# Altium PCB PCB1_b.PCBDOC
Units mil, origin at the board's own origin, x right, y up, seen from the top; angles counter-clockwise.
Board outline 6000 x 4000 mil, 2 copper layers (Top Layer, Bottom Layer); 30 components, 0 nets, 297 pads, 42 vias.
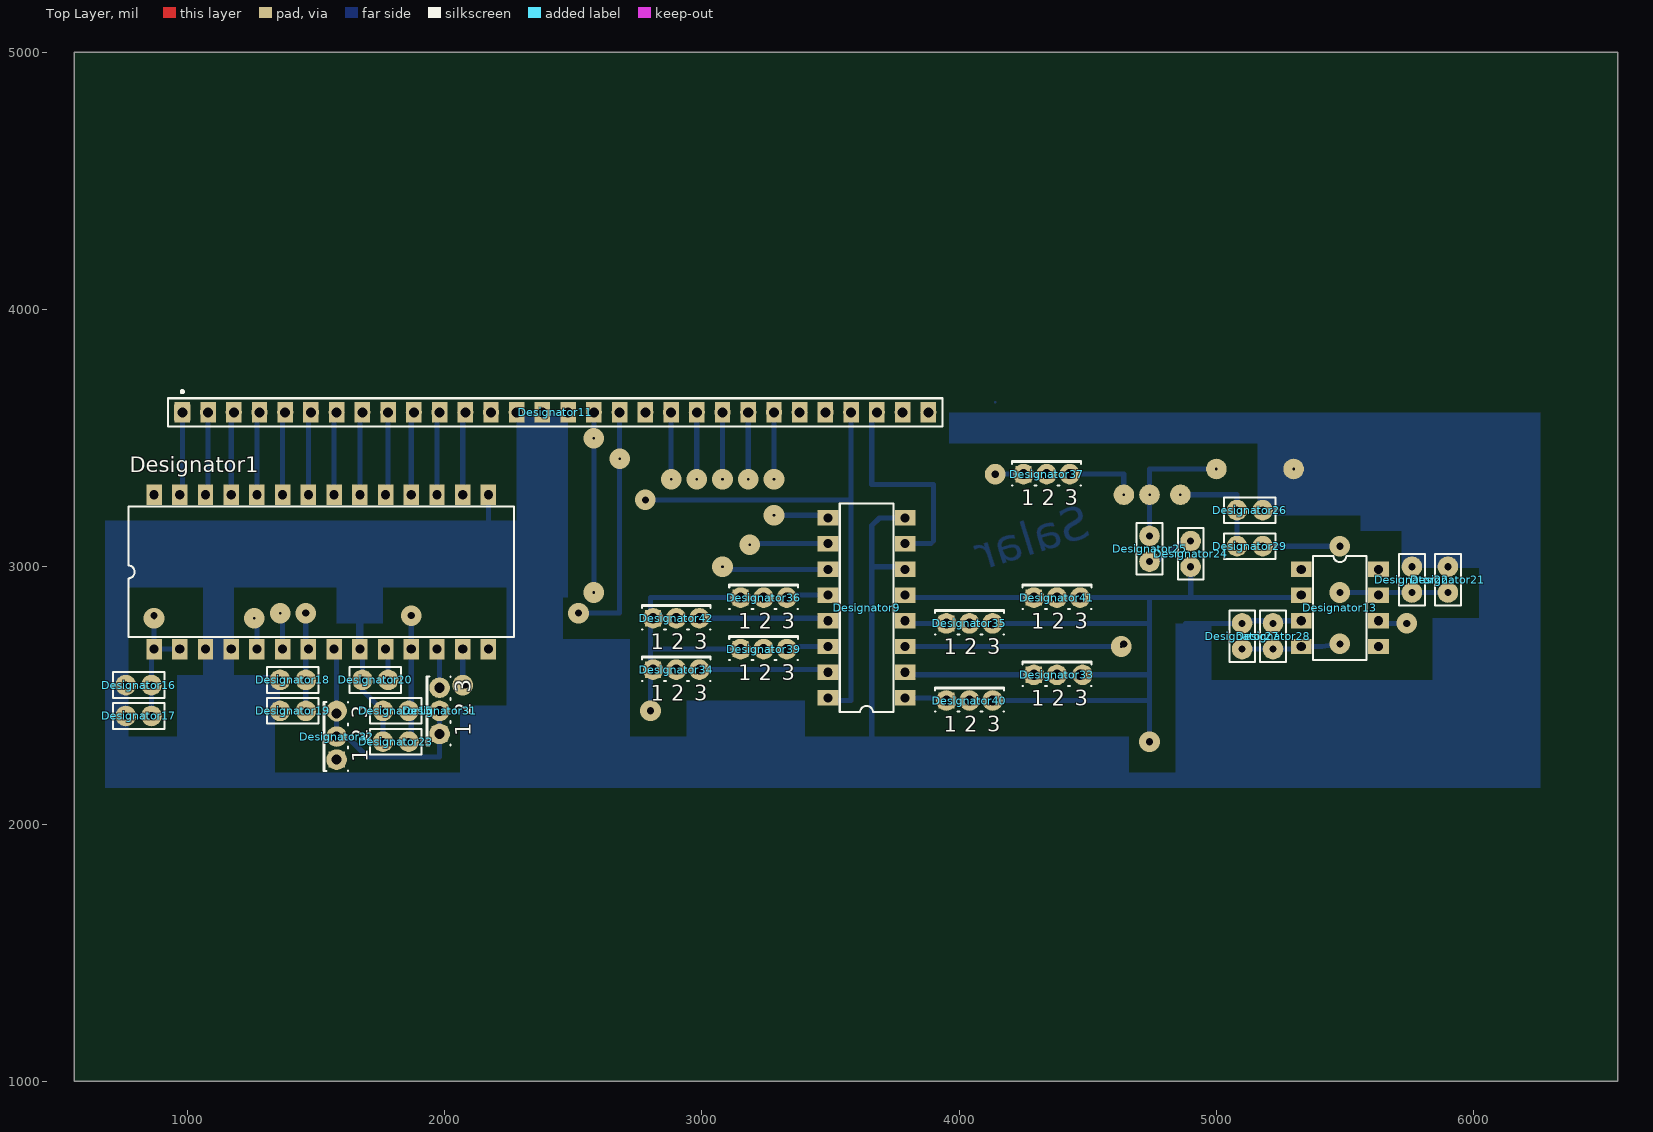
[diagram p0: Top Layer view]
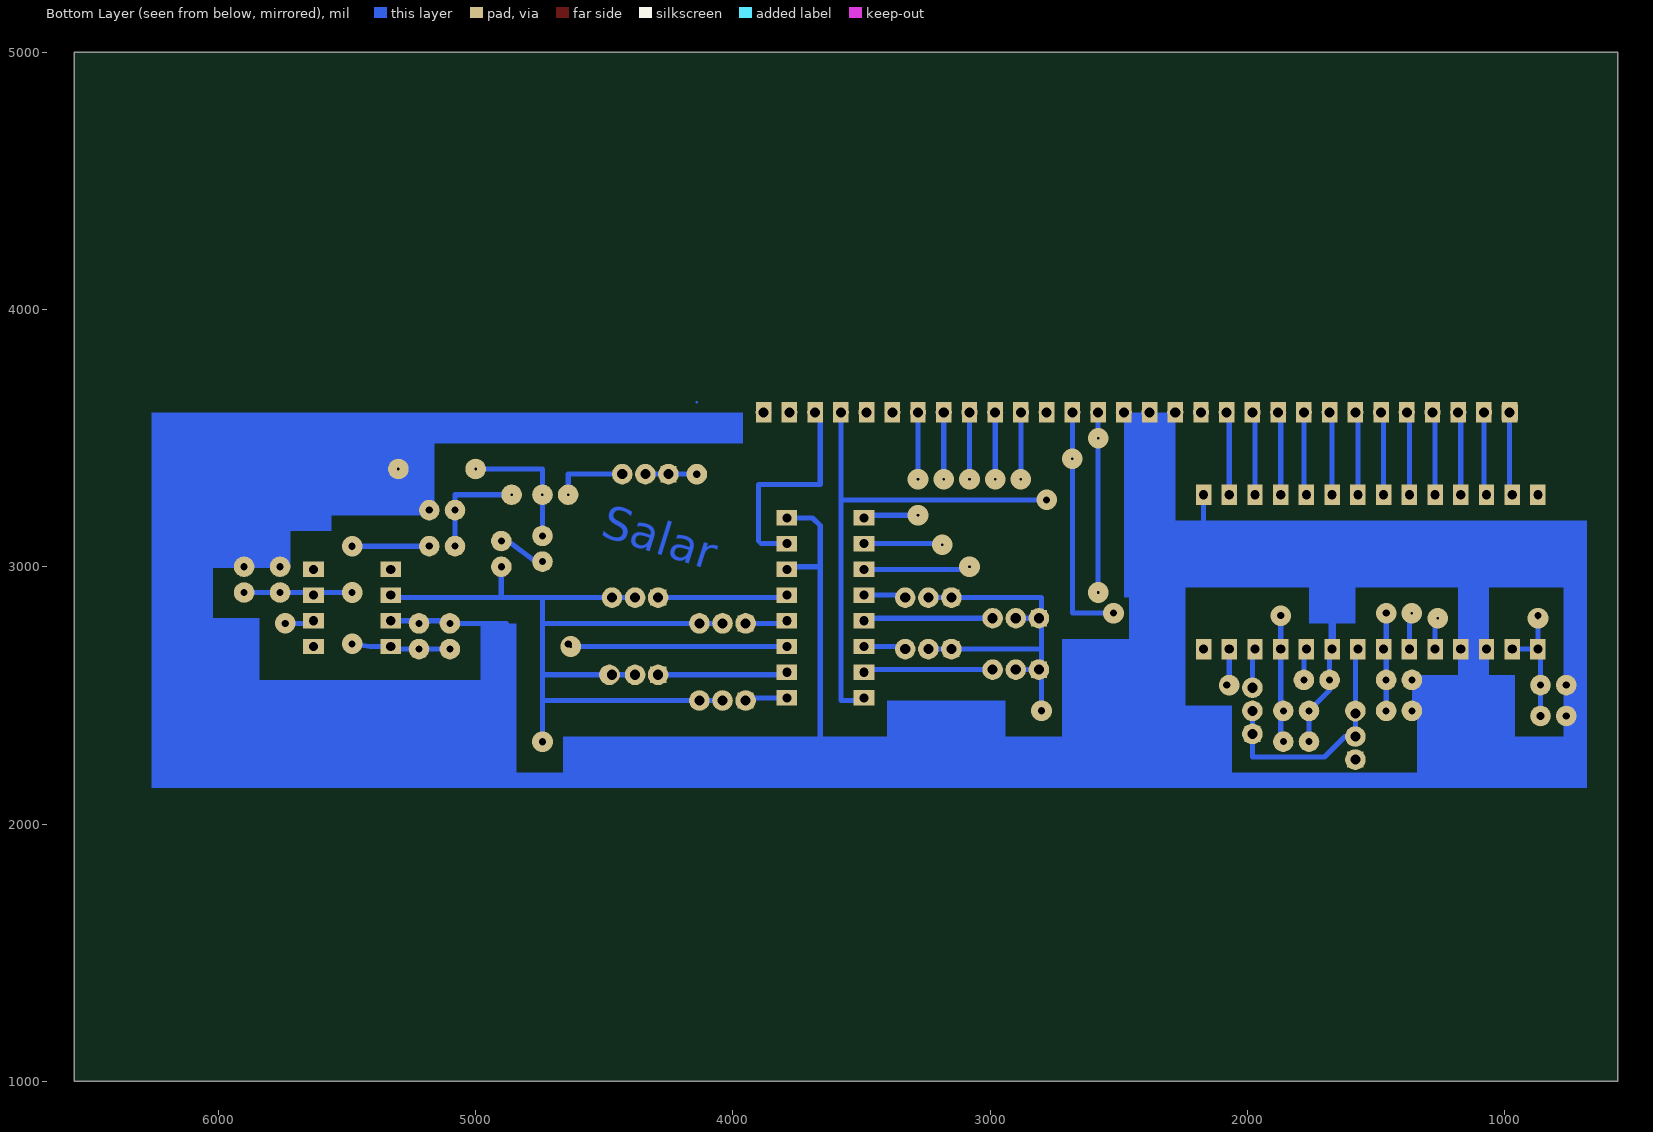
[diagram p1: Bottom Layer view, seen from below]

## Layer stack, top to bottom
Top Layer: signal copper 1.4
Dielectric: dielectric 12.6, FR-4, Dk 4.8
Bottom Layer: signal copper 1.4

## Board outline
560,1000 560,5000 6560,5000 6560,1000

## Design rules (kind name [scope] priority, off if disabled: settings)
Clearance [All] p1: gap=10
ComponentClearance [All] p1: gap=10 collisioncheckmode=0
PolygonConnect [All] p1: connectstyle=Relief reliefconductorwidth=10 reliefentries=4 polygonreliefangle="90 Angle"
RoutingLayers [All] p1: top layer=Horizontal bottom layer=Vertical
RoutingVias [All] p1: holewidth=28 width=50 viastyle="Through Hole" minholewidth=28 minwidth=50 maxholewidth=28 maxwidth=50
SolderMaskExpansion [All] p1: expansion=4
TestPointUsage [All] p1: valid=0 allowmultiple=FALSE
Testpoint [All] p1: side=15 testpointundercomponent=TRUE minsize=40 maxsize=100 preferedsize=60 minholesize=0 maxholesize=40 preferedholesize=32 testpointgrid=1 style=1023 order=1234567890
Width [All] p1: maxlimit=10 minlimit=10 preferedwidth=10
10 further rules are at their usual default settings.

## Components (designator, comment, footprint, x,y, rotation, side; value= is the part's Value field where it differs from the comment)
Designator1 "Comment" DIP-28/D38.1 1520,2980 r0 top
Designator9 "Comment" DIP-16 3640,2840 r90 top
Designator11 "Comment" HDR1X30 980,3600 r0 top
Designator13 "Comment" DIP-8 5480,2840 r270 top
Designator15 "Comment" RAD-0.1 1760,2440 r0 top
Designator16 "Comment" RAD-0.1 760,2540 r0 top
Designator17 "Comment" RAD-0.1 760,2420 r0 top
Designator18 "Comment" RAD-0.1 1360,2560 r0 top
Designator19 "Comment" RAD-0.1 1360,2440 r0 top
Designator20 "Comment" RAD-0.1 1680,2560 r0 top
Designator21 "Comment" RAD-0.1 5900,2900 r90 top
Designator22 "Comment" RAD-0.1 5760,2900 r90 top
Designator23 "Comment" RAD-0.1 1760,2320 r0 top
Designator24 "Comment" RAD-0.1 4900,3000 r90 top
Designator25 "Comment" RAD-0.1 4740,3020 r90 top
Designator26 "Comment" RAD-0.1 5080,3220 r0 top
Designator27 "Comment" RAD-0.1 5100,2680 r90 top
Designator28 "Comment" RAD-0.1 5220,2680 r90 top
Designator29 "Comment" RAD-0.1 5080,3080 r0 top
Designator31 "Comment" SFM-T3/A2.4V 1980,2440 r90 top
Designator32 "Comment" SFM-T3/A2.4V 1580,2340 r90 top
Designator33 "Comment" SFM-T3/A2.4V 4380,2580 r0 top
Designator34 "Comment" SFM-T3/A2.4V 2900,2600 r0 top
Designator35 "Comment" SFM-T3/A2.4V 4040,2780 r0 top
Designator36 "Comment" SFM-T3/A2.4V 3240,2880 r0 top
Designator37 "Comment" SFM-T3/A2.4V 4340,3360 r0 top
Designator39 "Comment" SFM-T3/A2.4V 3240,2680 r0 top
Designator40 "Comment" SFM-T3/A2.4V 4040,2480 r0 top
Designator41 "Comment" SFM-T3/A2.4V 4380,2880 r0 top
Designator42 "Comment" SFM-T3/A2.4V 2900,2800 r0 top

## Footprints (in the part's own frame and the unit in brackets; to place one, negate y for a bottom-side part, rotate by r counter-clockwise, add the part's x,y. Pads: shape width x height; smd on the part's side, far side on the other; paste and mask are expansions set on the pad)
DIP-8 [mm]
  rect 1.5x1.5 hole 0.9: 1(-3.81,-3.81)
  round 1.5 hole 0.9: 2(-1.27,-3.81) 3(1.27,-3.81) 4(3.81,-3.81) 5(3.81,3.81) 6(1.27,3.81) 7(-1.27,3.81) 8(-3.81,3.81)
  silkscreen extent -5.15,-2.65 5.15,2.65
DIP-16 [mm]
  rect 1.5x1.5 hole 0.9: 1(-8.89,-3.81)
  round 1.5 hole 0.9: 2(-6.35,-3.81) 3(-3.81,-3.81) 4(-1.27,-3.81) 5(1.27,-3.81) 6(3.81,-3.81) 7(6.35,-3.81) 8(8.89,-3.81) 9(8.89,3.81) 10(6.35,3.81) 11(3.81,3.81) 12(1.27,3.81) 13(-1.27,3.81) 14(-3.81,3.81) 15(-6.35,3.81) 16(-8.89,3.81)
  silkscreen extent -10.3,-2.65 10.3,2.65
DIP-28/D38.1 [mm]
  rect 1.5x1.5 hole 0.9: 1(-16.51,-7.62)
  round 1.5 hole 0.9: 2(-13.97,-7.62) 3(-11.43,-7.62) 4(-8.89,-7.62) 5(-6.35,-7.62) 6(-3.81,-7.62) 7(-1.27,-7.62) 8(1.27,-7.62) 9(3.81,-7.62) 10(6.35,-7.62) 11(8.89,-7.62) 12(11.43,-7.62) 13(13.97,-7.62) 14(16.51,-7.62) 15(16.51,7.62) 16(13.97,7.62) 17(11.43,7.62) 18(8.89,7.62) 19(6.35,7.62) 20(3.81,7.62) 21(1.27,7.62) 22(-1.27,7.62) 23(-3.81,7.62) 24(-6.35,7.62) 25(-8.89,7.62) 26(-11.43,7.62) 27(-13.97,7.62) 28(-16.51,7.62)
  silkscreen extent -19.05,-6.45 19.05,6.45
HDR1X30 [mm]
  rect 1.6x1.6 hole 0.99: 1(0,0)
  round 1.6 hole 0.99: 2(2.54,0) 3(5.08,0) 4(7.62,0) 5(10.16,0) 6(12.7,0) 7(15.24,0) 8(17.78,0) 9(20.32,0) 10(22.86,0) 11(25.4,0) 12(27.94,0) 13(30.48,0) 14(33.02,0) 15(35.56,0) 16(38.1,0) 17(40.64,0) 18(43.18,0) 19(45.72,0) 20(48.26,0) 21(50.8,0) 22(53.34,0) 23(55.88,0) 24(58.42,0) 25(60.96,0) 26(63.5,0) 27(66.04,0) 28(68.58,0) 29(71.12,0) 30(73.66,0)
  silkscreen extent -1.4,-1.4 75.06,2.17
RAD-0.1 [mm]
  round 1.2 hole 0.7: 1(0,0) 2(2.54,0)
  silkscreen extent -1.27,-1.27 3.81,1.27
SFM-T3/A2.4V [mm]
  rect 1.6x1.6 hole 1: 1(-2.28,0)
  round 1.6 hole 1: 2(0,0) 3(2.28,0)
  silkscreen extent -3.4,-1.1 3.4,1.3

## Free pads (board coordinates)
  rect 60x80 hole 10: 0(1480,3600) 0(2780,3600) 0(3880,3600) 1(1380,3600) 1(2680,3600) 1(3780,3600) 2(1280,3600) 2(2580,3600) 2(3680,3600) 3(1180,3600) 3(2480,3600) 3(3580,3600) 4(1080,3600) 4(2380,3600) 4(3480,3600) 5(980,3600) 5(2280,3600) 5(3280,3600) 6(870,3280) 6(2180,3600) 6(3380,3600) 7(970,3280) 7(2080,3600) 7(3080,3600) 8(1070,3280) 8(1980,3600) 8(2980,3600) 9(1170,3280) 9(1880,3600) 9(2880,3600) 10(1270,3280) 10(1780,3600) 10(3180,3600) 11(1370,3280) 11(1680,3600) 12(1470,3280) 12(1580,3600) 13(1570,3280) 14(1670,3280) 15(1770,3280) 16(1870,3280) 17(1970,3280) 18(2070,3280) 19(2170,3280) 20(2170,2680) 21(2070,2680) 22(1970,2680) 23(1870,2680) 24(1770,2680) 25(1670,2680) 26(1570,2680) 27(1470,2680) 28(1370,2680) 29(1270,2680) 30(1170,2680) 31(1070,2680) 32(970,2680) 33(870,2680)
  rect 80x60 hole 10: 0(3790,3190) 1(3790,3090) 2(3790,2990) 3(3790,2890) 4(3790,2790) 5(3790,2690) 6(3790,2590) 7(3790,2490) 8(3490,2490) 9(3490,2590) 10(3490,2690) 11(3490,2790) 12(3490,2890) 13(3490,2990) 14(3490,3090) 15(3490,3190) 16(5630,2690) 17(5630,2790) 18(5630,2890) 19(5630,2990) 20(5330,2990) 21(5330,2890) 22(5330,2790) 23(5330,2690)
  round 80 hole 10: 0(4740,3280) 24(760,2540) 25(760,2420) 27(860,2540) 28(1360,2560) 29(1360,2440) 30(1460,2440) 31(1460,2560) 31(4140,3360) 32(1680,2560) 32(4250.24,3360) 33(1580,2440) 33(4340,3360) 34(1580,2340) 34(4429.76,3360) 35(1580,2250.24) 35(4640,3280) 36(1780,2560) 37(1760,2440) 37(4860,3280) 38(1760,2320) 38(5000,3380) 39(1860,2320) 39(5300,3380) 40(1860,2440) 41(2070,2540) 42(1980,2529.76) 43(1980,2440) 44(1980,2350.24) 45(2989.76,2600) 46(2900,2600) 47(2810.24,2600) 48(2810.24,2800) 49(2900,2800) 50(2989.76,2800) 51(3329.76,2880) 52(3240,2880) 53(3150.24,2880) 54(3150.24,2680) 55(3240,2680) 56(3329.76,2680) 73(3950.24,2480) 74(4040,2480) 75(4129.76,2480) 76(4129.76,2780) 77(4040,2780) 78(3950.24,2780) 79(4290.24,2880) 80(4380,2880) 81(4469.76,2880) 82(4480,2580) 83(4380,2580) 84(4290.24,2580) 85(5100,2680) 86(5100,2780) 87(5220,2780) 88(5220,2680) 93(5180,3080) 94(5180,3220) 95(5080,3220) 96(5080,3080) 97(4900,3100) 98(4900,3000) 99(4740,3020) 100(4740,3120) 105(5760,2900) 106(5900,3000) 107(5900,2900) 108(5760,3000)
  round 80 hole 30: 26(860,2420)

## Via types
v1: diameter 80, hole 10, Top Layer to Bottom Layer, 27 vias
v2: diameter 50, hole 28, Top Layer to Bottom Layer, 15 vias

## Nets (pads, with @x,y where several pads share a name; then routed paths per layer and width w, separated by ;. In a path a pad name is that pad's centre, name@x,y a point inside that pad or via, vN(x,y) a via of type N, cw(c..) or ccw(c..) an arc to the next point about the centre after c; other vN are vias at no path point)
pads on no net: Designator1.1 Designator1.2 Designator1.3 Designator1.4 Designator1.5 Designator1.6 Designator1.7 Designator1.8 Designator1.9 Designator1.10 Designator1.11 Designator1.12 Designator1.13 Designator1.14 Designator1.15 Designator1.16 Designator1.17 Designator1.18 Designator1.19 Designator1.20 Designator1.21 Designator1.22 Designator1.23 Designator1.24 Designator1.25 Designator1.26 Designator1.27 Designator1.28 Designator9.1 Designator9.2 Designator9.3 Designator9.4 Designator9.5 Designator9.6 Designator9.7 Designator9.8 Designator9.9 Designator9.10 Designator9.11 Designator9.12 Designator9.13 Designator9.14 Designator9.15 Designator9.16 Designator11.1 Designator11.2 Designator11.3 Designator11.4 Designator11.5 Designator11.6 Designator11.7 Designator11.8 Designator11.9 Designator11.10 Designator11.11 Designator11.12 Designator11.13 Designator11.14 Designator11.15 Designator11.16 Designator11.17 Designator11.18 Designator11.19 Designator11.20 Designator11.21 Designator11.22 Designator11.23 Designator11.24 Designator11.25 Designator11.26 Designator11.27 Designator11.28 Designator11.29 Designator11.30 Designator13.1 Designator13.2 Designator13.3 Designator13.4 Designator13.5 Designator13.6 Designator13.7 Designator13.8 Designator15.1 Designator15.2 Designator16.1 Designator16.2 Designator17.1 Designator17.2 Designator18.1 Designator18.2 Designator19.1 Designator19.2 Designator20.1 Designator20.2 Designator21.1 Designator21.2 Designator22.1 Designator22.2 Designator23.1 Designator23.2 Designator24.1 Designator24.2 Designator25.1 Designator25.2 Designator26.1 Designator26.2 Designator27.1 Designator27.2 Designator28.1 Designator28.2 Designator29.1 Designator29.2 Designator31.1 Designator31.2 Designator31.3 Designator32.1 Designator32.2 Designator32.3 Designator33.1 Designator33.2 Designator33.3 Designator34.1 Designator34.2 Designator34.3 Designator35.1 Designator35.2 Designator35.3 Designator36.1 Designator36.2 Designator36.3 Designator37.1 Designator37.2 Designator37.3 Designator39.1 Designator39.2 Designator39.3 Designator40.1 Designator40.2 Designator40.3 Designator41.1 Designator41.2 Designator41.3 Designator42.1 Designator42.2 Designator42.3
copper on no net: | length 31420.7
  Top Layer w10: v1@1260,2820 v1@1270,2810 ; v2@2060,2540 v2(2080,2540) ; v1@3160,3080 v1@3180,3100
  Bottom Layer w10: 760,2180 780,2160 ; v2@860,2820 v2(870,2810) ; 1070,3280 1080,3290 ; 1170,3590 1180,3600 ; 1270,3590 1280,3600 ; v1(1360,2820) v1@1370,2810 ; 1370,3590 1380,3600 ; 1470,3590 1480,3600 ; 1570,2680 1580,2670 ; 1570,3590 1580,3600 ; 1670,3590 1680,3600 ; 1770,3280 1780,3290 ; 1780,2560 1780,2580 ; 1860,2320 1870,2330 ; 1860,3600 1870,3590 ; 1970,2680 1980,2690 1980,2700 ; 1970,3590 1980,3600 ; 2070,3590 2080,3600 ; v2@2520,2800 v2@2540,2820 ; v1(2580,2900) v1@2580,2920 ; v1(3080,3000) 3090,2990 3250,2990 ; v1@3180,3100 3180,3080 3190,3090 3250,3090 ; 3480,3200 3490,3190 ; 3780,3000 3790,2990 ; 3790,2590 3800,2580 ; 3790,2790 3800,2780 ; 3790,2890 3800,2880 ; 3890,3090 3900,3100 ; 3940.24,2490 3950.24,2480 ; 4469.76,2880 4740,2880 ; 4640,2480 4740,2480 ; 4640,2580 4740,2580 ; 4640,2780 4740,2780 ; 4900,3100 4900,3120 ; 5100,2780 5110,2790 ; 5620,2900 5640,2880 ; 5630,2890 5640,2900 ; 5760,3000 6080,3000
  Bottom Layer w20: 760,2180 760,2420 760,3160 ; 860,2440 860,2680 ; v2(870,2810) 870,2680 980,2680 ; 980,3300 980,3560 ; 1070,2680 1070,2970 ; 1080,3290 1080,3600 ; 1170,2680 1170,2910 ; 1170,3280 1170,3590 ; 1270,2680 v1@1270,2810 ; 1270,3280 1270,3590 ; 1370,2680 v1@1370,2810 ; 1370,3280 1370,3590 ; 1460,2440 1460,2700 v2@1460,2840 ; 1470,3280 1470,3590 ; 1570,3280 1570,3590 ; 1580,2670 1580,2340 1620,2340 1700,2260 1980,2260 1980,2440 ; 1670,3280 1670,3590 ; 1680,2670 1680,2560 1680,2520 1760,2440 1760,2320 ; 1780,2560 1780,2670 ; 1780,3290 1780,3600 ; 1870,2330 1870,2680 v1(1870,2810) ; 1870,3280 1870,3590 ; 1970,3280 1970,3590 ; 1980,2529.76 1980,2700 ; v2@2070,2530 2070,2680 ; 2070,3280 2070,3590 ; 2170,3130 2170,3280 ; 2260,2320 3660,2320 3660,3160 3690,3190 3790,3190 ; v1(2520,2820) 2680,2820 2680,3600 ; v1@2580,2920 2580,3600 ; v1(2780,3260) 3580,3260 ; v1(2800,2440) 2800,2880 3150.24,2880 3240,2880 ; 2800,2680 3150.24,2680 3240,2680 ; 2810.24,2600 2900,2600 ; 2810.24,2800 2900,2800 ; v1(2880,3340) 2880,3600 ; v1(2980,3340) 2980,3600 ; 2989.76,2600 3480,2600 ; 2989.76,2800 3480,2800 ; v1(3080,3340) 3080,3600 ; v1(3180,3340) 3180,3600 ; v1@3190,3090 3490,3090 ; 3250,2990 3100,2990 3490,2990 ; v1(3280,3200) 3480,3200 ; v1(3280,3340) 3280,3600 ; 3339.76,2690 3490,2690 ; 3339.76,2890 3490,2890 ; 3500,2480 3580,2480 3580,3600 ; 3660,3000 3780,3000 ; 3660,3600 3660,3320 3900,3320 3900,3100 ; 3790,2490 3940.24,2490 ; 3790,2690 v1(4630,2690) ; 3790,3090 3890,3090 ; 3800,2580 4280,2580 ; 3800,2780 3950.24,2780 ; 3800,2880 4290.24,2880 ; 4040,2480 4740,2480 ; 4040,2780 4740,2780 ; v1(4140,3360) 4330.24,3360 ; 4380,2580 4740,2580 ; 4380,2880 4740,2880 ; 4429.76,3360 4640,3360 4640,3280 ; v1(4740,2320) 4740,2880 ; 4740,3000 4900,3120 ; 4740,3120 4740,3260 4740,3380 4980,3380 ; 4860,3280 5080,3280 5080,3220 5080,3080 ; 4880,2780 5100,2780 ; 4900,2880 4900,3000 ; 5100,2680 5320,2680 ; 5110,2790 5330,2790 ; 5180,3080 v1(5480,3080) ; 5320,2880 4740,2880 ; 5330,2690 5410,2690 v1(5480,2700) ; v1(5480,2900) 5620,2900 ; 5640,2900 5900,2900 ; 5660,2780 v1(5740,2780)
  Bottom Layer w30: 1670,2680 1670,2910
  other v1: 2070,2540 870,2800 1260,2800 1460,2820 3185.53,3085.53 2680,3420 2580,3500
  other v2: 4740,2320 2800,2440 4640,2700 5480,2700 5740,2780 5740,2780 1870,2810 1460,2820 2520,2820 5480,2900 5480,3080 2780,3260 4140,3360

## Other copper
Bottom Layer:
  rectangle: 2280,2880 2480,3600
  rectangle: 4840,2180 4980,2780
  rectangle: 2060,2140 2340,2460
  rectangle: 2420,2220 2720,2720
  rectangle: 960,2180 1340,2580
  rectangle: 720,2140 6260,2200
  rectangle: 740,2160 1180,2340
  rectangle: 5740,3440 6260,3600
  rectangle: 5840,2460 6080,2800
  rectangle: 5720,3000 6100,3600
  rectangle: 6020,2160 6260,3540
  rectangle: 2240,2160 4660,2340
  rectangle: 2240,2320 2460,3100
  rectangle: 1060,2440 1360,2560
  rectangle: 1580,2780 1760,2920
  rectangle: 1060,2480 1180,3000
  rectangle: 4920,2180 6060,2560
  rectangle: 3960,3480 6180,3600
  rectangle: 5160,3200 5940,3480
  rectangle: 5560,3140 5780,3560
  rectangle: 2940,2260 3400,2480
  rectangle: 680,2140 760,3160
  rectangle: 680,2920 2460,3180
  text "Salar" at 4520,3120 h130 r17.35

## Text inside footprints (layer, text, board x,y; h text height)
Designator31: Top Overlay "1" at 2101.06,2340.39 h59.06 r90; Top Overlay "2" at 2101.06,2420.32 h59.06 r90; Top Overlay "3" at 2101.06,2510.08 h59.06 r90
Designator32: Top Overlay "3" at 1701.06,2410.08 h59.06 r90; Top Overlay "2" at 1701.06,2320.32 h59.06 r90; Top Overlay "1" at 1701.06,2240.39 h59.06 r90
Designator33: Top Overlay "3" at 4450.08,2458.94 h59.06; Top Overlay "2" at 4360.31,2458.94 h59.06; Top Overlay "1" at 4280.39,2458.94 h59.06
Designator34: Top Overlay "3" at 2970.08,2478.94 h59.06; Top Overlay "2" at 2880.32,2478.94 h59.06; Top Overlay "1" at 2800.39,2478.94 h59.06
Designator35: Top Overlay "3" at 4110.08,2658.94 h59.06; Top Overlay "2" at 4020.32,2658.94 h59.06; Top Overlay "1" at 3940.39,2658.94 h59.06
Designator36: Top Overlay "3" at 3310.08,2758.94 h59.06; Top Overlay "2" at 3220.32,2758.94 h59.06; Top Overlay "1" at 3140.39,2758.94 h59.06
Designator37: Top Overlay "3" at 4410.08,3238.94 h59.06; Top Overlay "2" at 4320.31,3238.94 h59.06; Top Overlay "1" at 4240.39,3238.94 h59.06
Designator39: Top Overlay "3" at 3310.08,2558.94 h59.06; Top Overlay "2" at 3220.32,2558.94 h59.06; Top Overlay "1" at 3140.39,2558.94 h59.06
Designator40: Top Overlay "3" at 4110.08,2358.94 h59.06; Top Overlay "2" at 4020.32,2358.94 h59.06; Top Overlay "1" at 3940.39,2358.94 h59.06
Designator41: Top Overlay "3" at 4450.08,2758.94 h59.06; Top Overlay "2" at 4360.31,2758.94 h59.06; Top Overlay "1" at 4280.39,2758.94 h59.06
Designator42: Top Overlay "3" at 2970.08,2678.94 h59.06; Top Overlay "2" at 2880.32,2678.94 h59.06; Top Overlay "1" at 2800.39,2678.94 h59.06